# EAGLE board 6packRev1C (EAGLE 9.2.0)
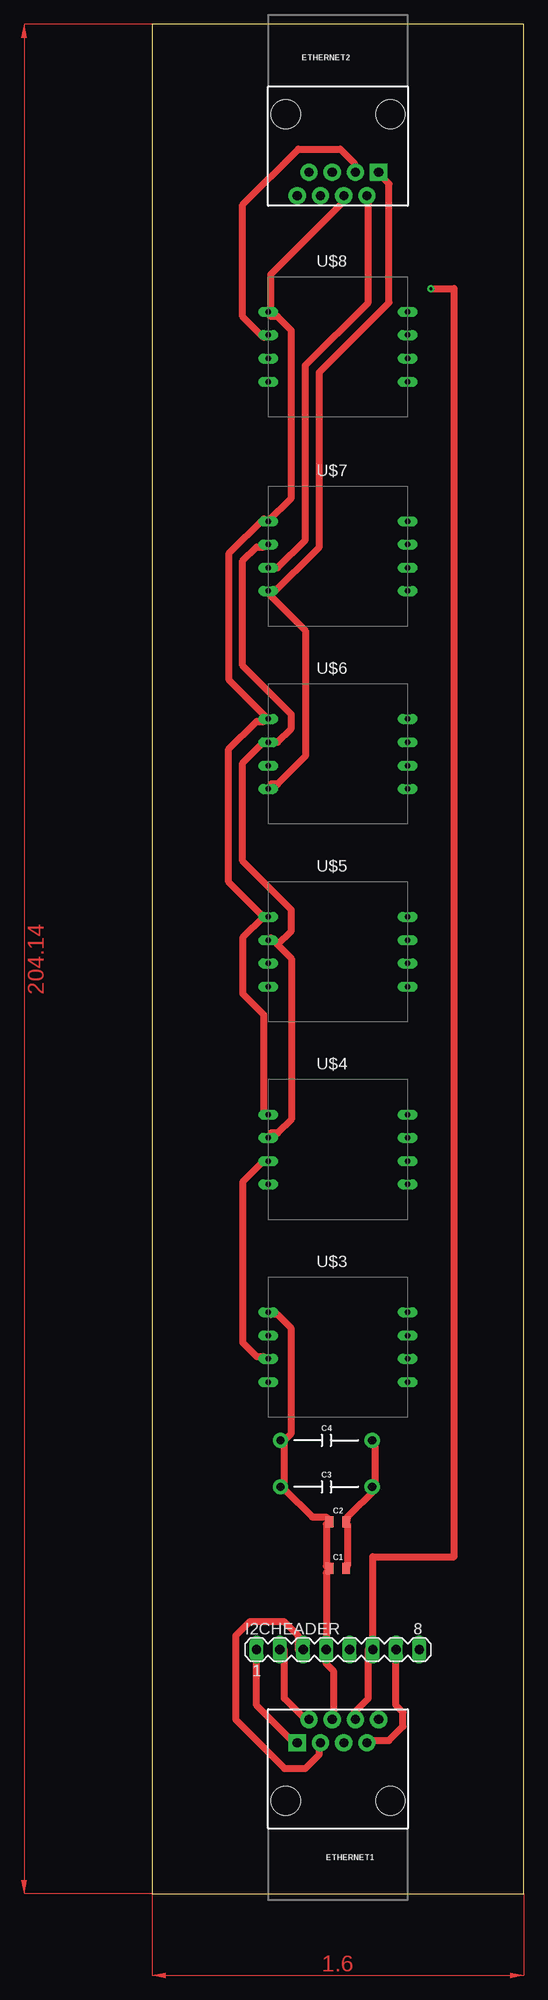
[diagram p0: board, top side]
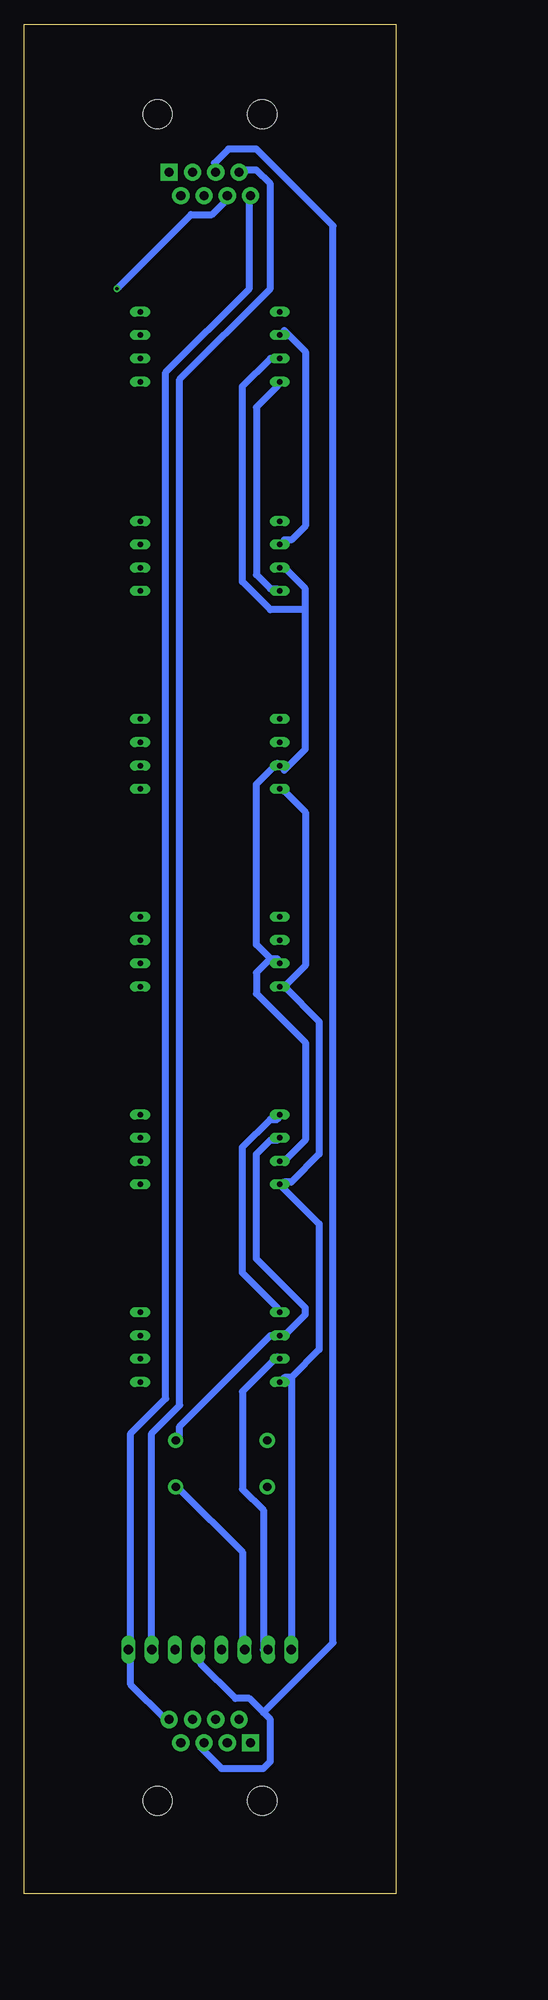
[diagram p1: board, bottom side, seen from below]

Size 40.62 x 204.14 mm. Coordinates in mm from the lower left corner, seen from the top.
Outline: 0,0 40.62,0 40.62,204.14 0,204.14 0,0
Copper layers (1*16): Top 0.035mm / dielectric 1.5mm / Bottom 0.035mm
Design rules "default": minimum track width 6mil, minimum drill 0.35mm, track to track 6mil, track to pad 6mil, pad to pad 6mil, via to via 6mil, smd to smd 6mil, copper to edge 40mil, drill to drill 6mil, minimum pad ring 10mil, minimum via ring 8mil, stop-mask expansion 4mil, vias tented up to drill 0mil, thermal gap 10mil
Net classes: 0 default: width 0.762 mm, clearance 0.762 mm

## Footprints (pad centres in the part's own frame; a part is rotated, then mirrored left to right if it is on the bottom)
0805 = smd 0.8 x 1.2: 1 -0.9,0; 2 0.9,0
CAP-PTH-10MM = drill 0.9 pad 1.651: 1 -5,0; 2 5,0
RJ45-8 = drill 1 pad 1.88 square: 1 -4.445,6.35 | drill 1 pad 1.88: 2 -3.175,8.89; 3 -1.905,6.35; 4 -0.635,8.89; 5 0.635,6.35; 6 1.905,8.89; 7 3.175,6.35; 8 4.445,8.89 | hole 3.2: -5.715,0; 5.715,0
MA08-1 = drill 1.016 long: 1 -8.89,0; 2 -6.35,0; 3 -3.81,0; 4 -1.27,0; 5 1.27,0; 6 3.81,0; 7 6.35,0; 8 8.89,0
DIP8W = drill 0.6 long: P1 -7.62,3.81; P2 -7.62,1.27; P3 -7.62,-1.27; P4 -7.62,-3.81; P5 7.62,-3.81; P6 7.62,-1.27; P7 7.62,1.27; P8 7.62,3.81

## Placement (x,y rotation side)
C1  0.33µF  [0805]  20.32,35.56 0 top
C2  0.33µF  [0805]  20.32,40.64 0 top
C3  10nF  [CAP-PTH-10MM]  19.05,44.45 0 top
C4  10nF  [CAP-PTH-10MM]  19.05,49.53 0 top
ETHERNET1  RJ452XI2C  [RJ45-8]  20.32,10.16 0 top
ETHERNET2  RJ452XI2C  [RJ45-8]  20.32,194.31 180 top
FRAME1  FRAME-LEDGER  [CREATIVE_COMMONS]  -77.47,62.23 0 top  (outside the outline)
I2CHEADER  [MA08-1]  20.32,26.67 0 top
U$3  [DIP8W]  20.32,59.69 0 top
U$4  [DIP8W]  20.32,81.28 0 top
U$5  [DIP8W]  20.32,102.87 0 top
U$6  [DIP8W]  20.32,124.46 0 top
U$7  [DIP8W]  20.32,146.05 0 top
U$8  [DIP8W]  20.32,168.91 0 top

## Library data of the parts
C1 C2 = SparkFun-Capacitors; PROD_ID: CAP-08469
C3 C4 = SparkFun-Capacitors; PROD_ID: CAP-09321
ETHERNET1 ETHERNET2 U$3-U$8 = untitled
FRAME1 = SparkFun-Aesthetics
I2CHEADER = con-lstb; OC_FARNELL: unknown; OC_NEWARK: unknown

## Nets
+5V1: C1.2 C2.2 C3.2 C4.2 ETHERNET1.3 ETHERNET2.3 I2CHEADER.3 U$3.P2 U$4.P2 U$5.P2 U$6.P2 U$7.P2 U$8.P2
+5V2: ETHERNET1.6 ETHERNET2.6 I2CHEADER.6
GND1: C1.1 C2.1 C3.1 C4.1 ETHERNET1.4 ETHERNET2.4 I2CHEADER.4 U$3.P1 U$4.P1 U$5.P1 U$6.P1 U$7.P1 U$8.P1
GND2: ETHERNET1.5 ETHERNET2.5 I2CHEADER.5
SCL1: ETHERNET1.1 ETHERNET2.1 I2CHEADER.1 U$3.P4 U$4.P4 U$5.P4 U$6.P4 U$7.P4 U$8.P4
SCL2: ETHERNET1.8 ETHERNET2.8 I2CHEADER.8
SDA1: ETHERNET1.2 ETHERNET2.2 I2CHEADER.2 U$3.P3 U$4.P3 U$5.P3 U$6.P3 U$7.P3 U$8.P3
SDA2: ETHERNET1.7 ETHERNET2.7 I2CHEADER.7

## Tracks (layer width: path | path; a pad name or v marks a point on that pad's centre or on a via)
+5V1
  Top 0.762: ETHERNET2.3 22.1,188.21 22.1,188.98 20.57,190.5 16,190.5 9.91,184.4 9.91,172.21 12.19,169.93 U$8.P2 | 13.72,103.63 12.95,104.39 U$5.P2 | 13.72,103.63 15.24,102.11 15.24,84.58 13.72,83.06 12.95,83.06 U$4.P2 | 13.72,103.63 15.24,105.16 15.24,107.44 9.91,112.78 9.91,123.44 12.19,125.73 U$6.P2 13.72,125.73 15.24,127.25 15.24,128.78 9.91,134.11 9.91,145.54 11.43,147.07 12.19,147.07 U$7.P2 | C1.2 21.34,35.81 21.34,40.39 C2.2 21.34,41.15 24.38,44.2 C3.2 24.38,44.96 24.38,49.53 C4.2 | ETHERNET1.3 18.29,16 18.29,15.24 16.76,13.72 14.48,13.72 9.14,19.05 9.14,28.19 10.67,29.72 14.48,29.72 16,28.19 16,26.67 I2CHEADER.3
  Bottom 0.762: U$7.P2 12.19,147.83 11.43,147.83 9.91,149.35 9.91,168.4 12.19,170.69 U$8.P2 | C4.2 23.62,49.53 23.62,51.05 13.72,60.96 U$3.P2 12.19,60.96 9.91,63.25 9.91,64.01 15.24,69.34 15.24,80.77 13.72,82.3 12.95,82.3 U$4.P2 | I2CHEADER.3 16.76,26.67 16.76,37.34 23.62,44.2 C3.2
+5V2  (via drill 0.35)
  Top 0.762: I2CHEADER.6 23.62,26.67 23.62,21.34 22.1,19.81 22.1,19.05 ETHERNET1.6 | 24.38,26.67 I2CHEADER.6 | I2CHEADER.6 24.13,36.83 33.02,36.83 33.02,175.26 v30.48,175.26
  Bottom 0.762: ETHERNET2.6 18.29,185.17 18.87,184.58 18.87,184.56 20.09,183.34 22.4,183.34 v30.48,175.26
GND1
  Top 0.762: ETHERNET2.4 21.34,185.17 12.95,176.78 12.95,172.97 U$8.P1 12.95,172.21 13.72,172.21 15.24,170.69 15.24,152.4 U$7.P1 12.19,150.11 8.38,146.3 8.38,132.59 U$6.P1 12.19,128.02 11.43,128.02 8.38,124.97 8.38,110.49 12.19,106.68 | 12.19,106.68 9.91,104.39 9.91,98.3 12.19,96.01 12.19,85.34 U$4.P1 | 14.48,49.53 15.24,50.29 15.24,61.72 13.72,63.25 12.95,63.25 U$3.P1 | ETHERNET1.4 19.81,19.05 19.81,24.38 19.05,25.15 I2CHEADER.4 19.05,35.05 C1.1 19.05,35.81 19.05,40.39 C2.1 19.05,41.15 17.53,41.15 14.48,44.2 C3.1 14.48,44.96 14.48,49.53 | 14.48,49.53 C4.1 | 12.19,106.68 U$5.P1
  Bottom 0.762: U$4.P1 12.95,84.58 13.72,84.58 16.76,81.53 16.76,67.82 12.95,64.01 U$3.P1
GND2
  Bottom 0.762: 14.48,19.81 13.72,19.05 13.72,14.48 14.48,13.72 19.05,13.72 21.34,16 ETHERNET1.5 | 14.48,19.81 16,21.34 17.53,21.34 21.34,25.15 21.34,26.67 I2CHEADER.5 | 14.48,19.81 6.86,27.43 6.86,182.12 15.24,190.5 18.29,190.5 19.81,188.98 19.81,188.21 ETHERNET2.5
SCL1
  Top 0.762: I2CHEADER.1 11.43,20.57 15.24,16.76 ETHERNET1.1 | 12.95,141.73 18.29,147.07 18.29,166.12 25.91,173.74 25.91,186.69 25.15,187.45 ETHERNET2.1 | 12.95,141.73 16.76,137.92 16.76,124.21 13.72,121.16 12.95,121.16 U$6.P4 | 12.95,141.73 U$7.P4
  Bottom 0.762: 11.43,56.39 12.19,56.39 U$3.P4 | 11.43,56.39 8.38,59.44 8.38,73.15 U$4.P4 12.19,77.72 11.43,77.72 8.38,80.77 8.38,95.25 12.19,99.06 | 11.43,56.39 I2CHEADER.1 | 12.19,99.06 9.91,101.35 9.91,118.11 12.19,120.4 U$6.P4 | U$7.P4 12.95,142.49 13.72,142.49 15.24,144.02 15.24,162.31 12.95,164.59 U$8.P4 | 12.19,99.06 U$5.P4
SCL2
  Bottom 0.762: 28.96,26.67 28.96,22.86 25.15,19.05 ETHERNET1.8 | 28.96,26.67 28.96,50.29 25.15,54.1 25.15,166.12 16,175.26 16,185.17 ETHERNET2.8 | 28.96,26.67 I2CHEADER.8
SDA1
  Top 0.762: I2CHEADER.2 14.48,26.67 14.48,21.34 16.76,19.05 ETHERNET1.2 | U$3.P3 12.19,58.67 11.43,58.67 9.91,60.2 9.91,77.72 12.19,80.01 U$4.P3 | U$7.P3 13.72,144.78 16.76,147.83 16.76,166.88 23.62,173.74 23.62,185.17 ETHERNET2.2
  Bottom 0.762: I2CHEADER.2 14.48,26.67 14.48,41.91 16.76,44.2 16.76,54.86 12.95,58.67 U$3.P3 | 13.72,102.11 12.95,102.11 U$5.P3 | 13.72,102.11 15.24,103.63 15.24,121.16 12.95,123.44 U$6.P3 12.19,122.68 9.91,124.97 9.91,140.21 | 9.91,140.21 9.91,142.49 12.19,144.78 U$7.P3 | U$8.P3 13.72,167.64 16.76,164.59 16.76,143.26 13.72,140.21 9.91,140.21 | 13.72,102.11 15.24,100.58 15.24,98.3 9.91,92.96 9.91,82.3 12.19,80.01 U$4.P3
SDA2
  Top 0.762: I2CHEADER.7 26.67,20.57 27.43,19.81 27.43,18.29 25.91,16.76 23.62,16.76 ETHERNET1.7
  Bottom 0.762: ETHERNET2.7 16.76,188.21 15.24,188.21 13.72,186.69 13.72,175.26 23.62,165.35 23.62,53.34 26.67,50.29 I2CHEADER.7
(copper drawn outside any net)
  shapes: Top area x2